# Altium PCB Guitar_Amp_PCB.PcbDoc
Units mm, origin at the board's own origin, x right, y up, seen from the top; angles counter-clockwise.
Board outline 60 x 50 mm, 2 copper layers (Top Layer, Bottom Layer), stack 1.273 mm thick; 65 components, 28 nets, 151 pads, 29 vias.
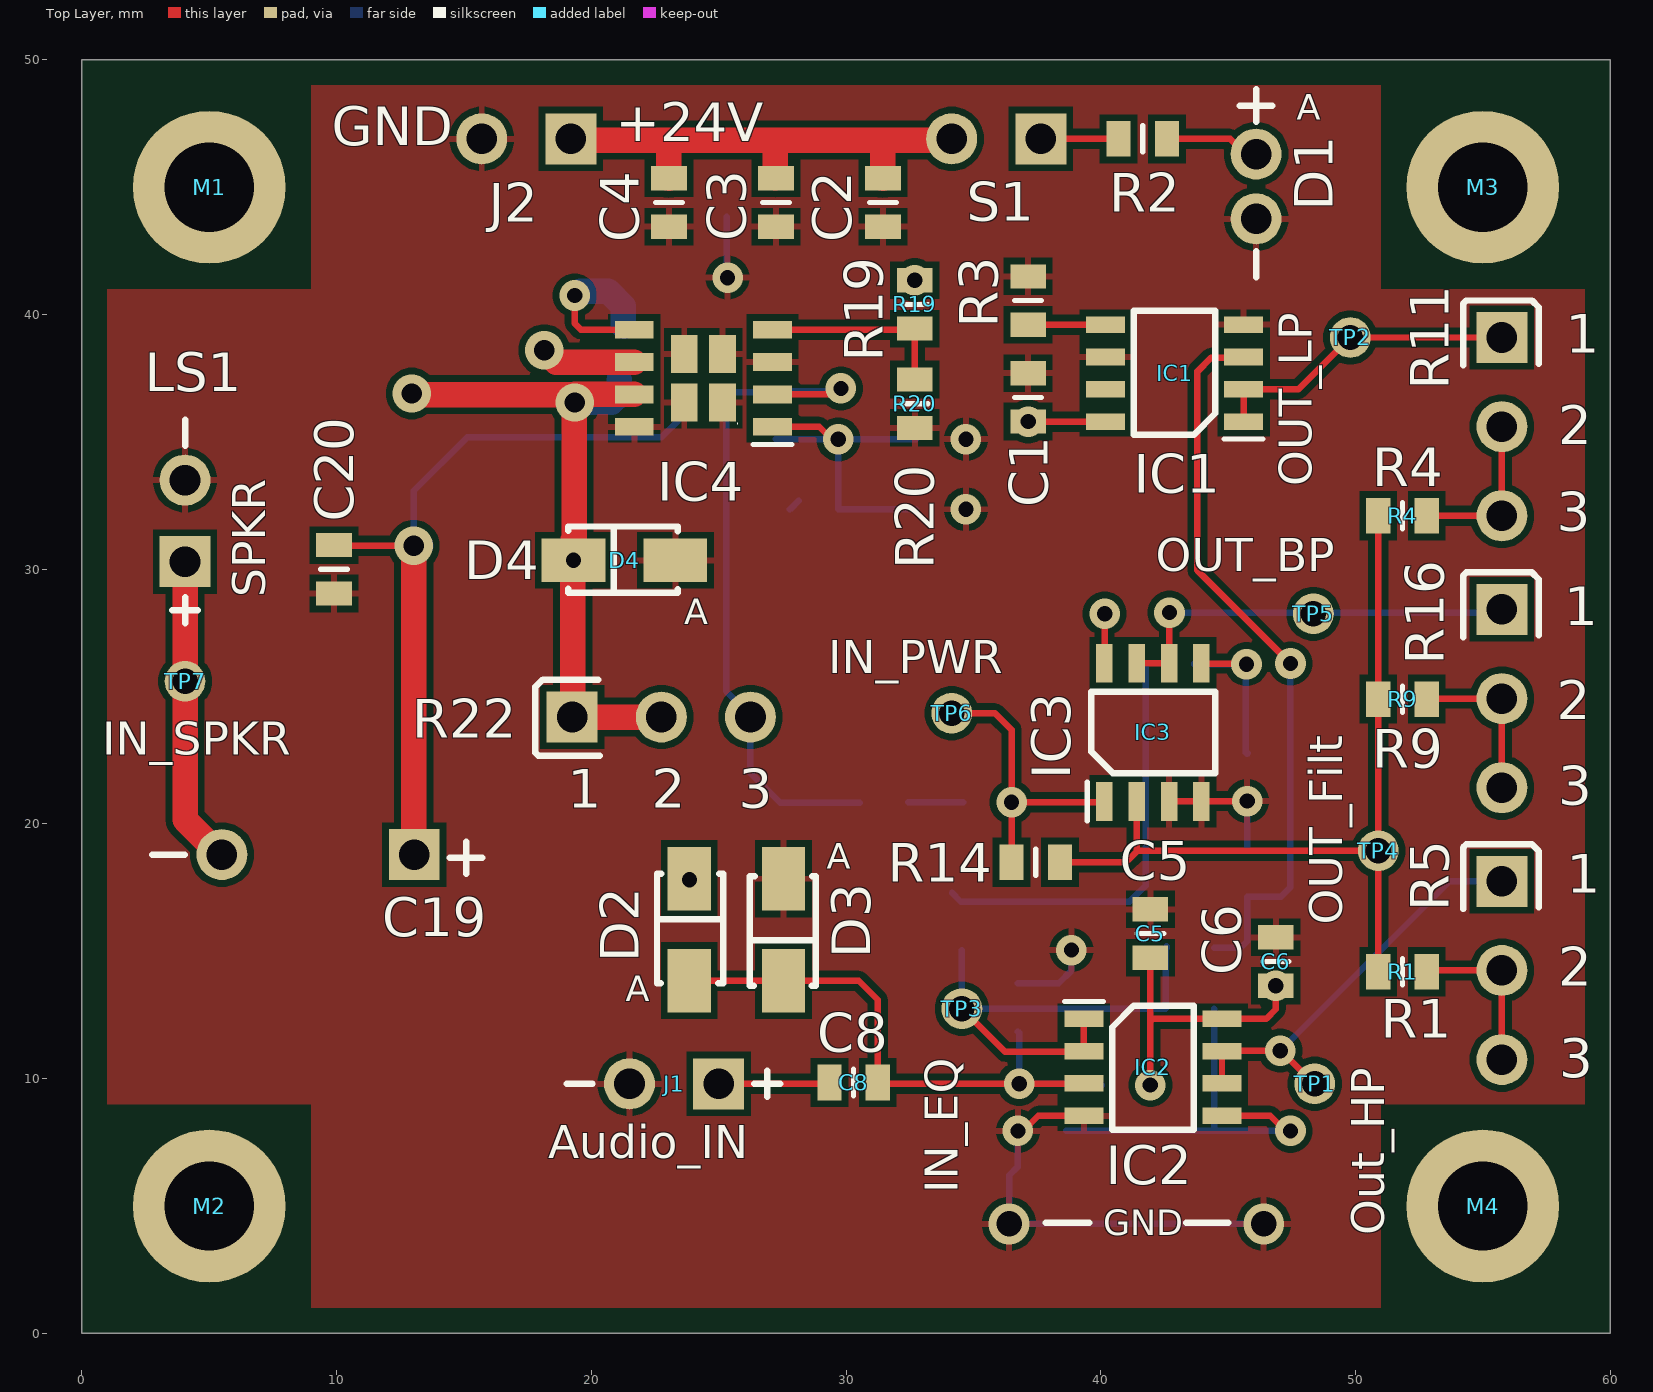
[diagram p0: Top Layer view]
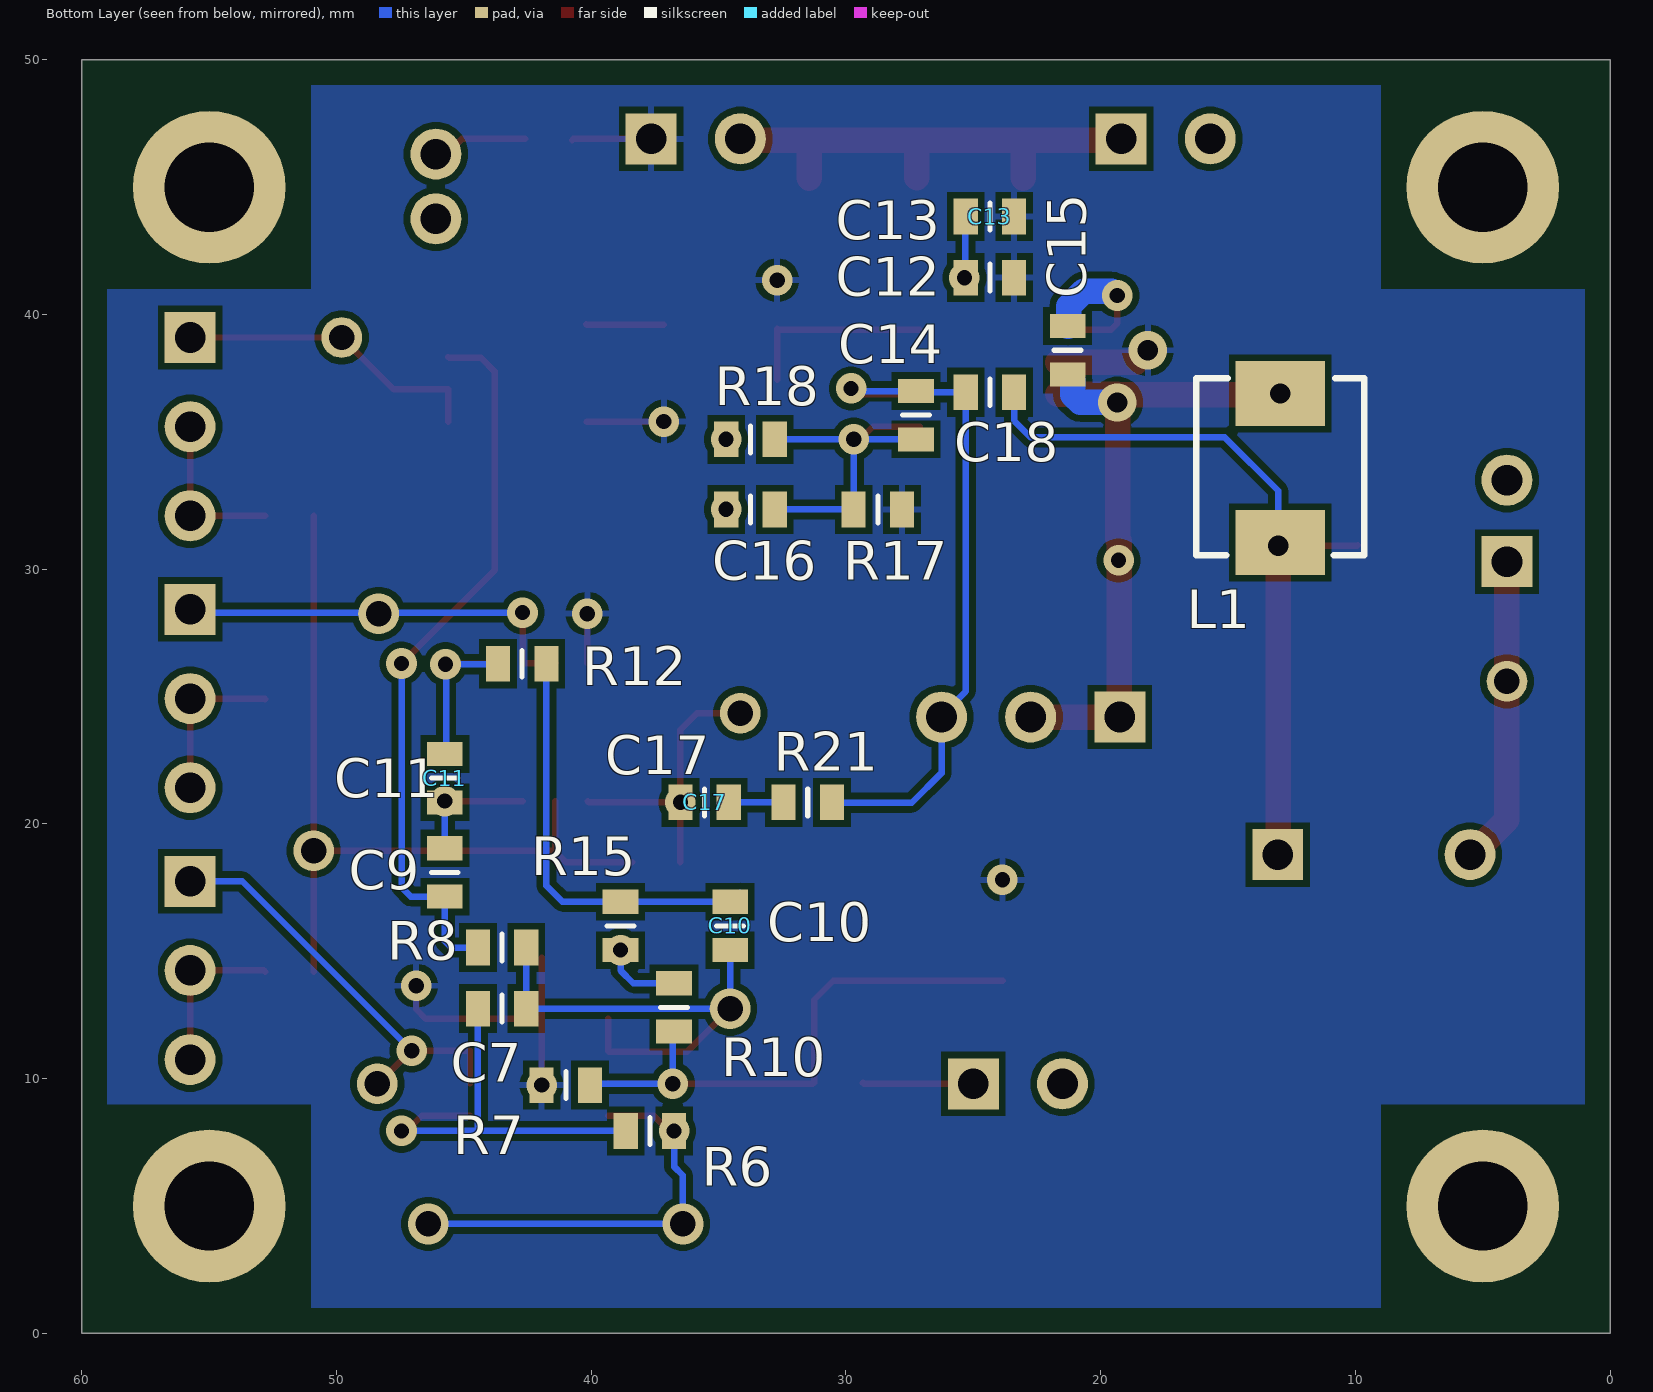
[diagram p1: Bottom Layer view, seen from below]

## Layer stack, top to bottom
Top Solder: solder mask 0.0102, Solder Resist, Dk 3.5
Top Layer: signal copper 0.07
Dielectric 2: prepreg 0.0711, PP-006, Dk 4.1
Dielectric 1: core 0.9906, Core-042, Dk 4.6
Dielectric 3: prepreg 0.0711, PP-006, Dk 4.1
Bottom Layer: signal copper 0.07
Bottom Solder: solder mask 0.0102, Solder Resist, Dk 3.5

## Board outline
0,0 60,0 60,50 0,50

## Design rules (kind name [scope] priority, off if disabled: settings)
Clearance [All] p1: gap=0.254 ignorepadtopadclearanceinfootprint=TRUE except(0: Arc-Hole Track-Hole SMDPad-Hole THPad-Hole Via-Hole Fill-Hole Poly-Hole Region-Hole Text-Hole)
HoleSize [All] p1: absolutevalues=TRUE maxlimit=4 minlimit=0.5 maxpercent=80.000 minpercent=20.000
MinimumAnnularRing [All] p1: minimumring=0.3
MinimumSolderMaskSliver [All] p1: minsoldermaskwidth=0.2
PolygonConnect [All] p1: connectstyle=Relief reliefconductorwidth=0.254 reliefentries=4 polygonreliefangle="90 Angle" airgapwidth=0.254
RoutingVias [All] p1: holewidth=0.711 width=1.27 viastyle="Through Hole" minholewidth=0.711 minwidth=1.27 maxholewidth=0.711 maxwidth=1.27
SilkToSilkClearance [All] p1: silktosilkclearance=0.15
SilkToSolderMaskClearance [IsPad] p1: minsilkscreentomaskgap=0.05 clearancetoexposedcopper=TRUE
SolderMaskExpansion [All] p1: expansion=0.1 istentingtop=FALSE
Width [All] p1: maxlimit=1 minlimit=0.254 preferedwidth=0.254 minimp=50.000000 maximp=50.000000 favimp=50.000000
26 further rules are at their usual default settings.

## Components (designator, comment, footprint, x,y, rotation, side; value= is the part's Value field where it differs from the comment)
C1 "100nF 0805" "C Template for 0805" 37.15,36.75 r90 top
C2 "100nF 0805" "C Template for 0805" 31.45,44.4 r270 top
C3 "100nF 0805" "C Template for 0805" 27.25,44.4 r270 top
C4 "100nF 0805" "C Template for 0805" 23.05,44.4 r270 top
C5 "100nF 0805" "C Template for 0805" 41.95,15.7 r90 top
C6 "100nF 0805" "C Template for 0805" 46.874,14.6 r90 top
C7 "8.2nF 0805" "C Template for 0805" 43.5,12.75 r0 bottom
C8 "82nF 0805" "C Template for 0805" 30.3,9.85 r0 top
C9 "82nF 0805" "C Template for 0805" 45.75,18.1 r270 bottom
C10 "82nF 0805" "C Template for 0805" 34.55,16 r90 bottom
C11 "8.2nF 0805" "C Template for 0805" 45.75,21.8 r90 bottom
C12 "2.2uF 0805" "C Template for 0805" 24.35,41.45 r180 bottom
C13 "100nF 0805" "C Template for 0805" 24.35,43.85 r180 bottom
C14 "5.6nF 0805" "C Template for 0805" 27.25,36.05 r270 bottom
C15 "470nF 0805" "C Template for 0805" 21.3,38.6 r90 bottom
C16 "10uF 0805" "C Template for 0805" 33.75,32.35 r180 bottom
C17 "2.2uF 0805" "C Template for 0805" 35.55,20.85 r180 bottom
C18 "22pF 0805" "C Template for 0805" 24.35,36.95 r0 bottom
C19 "1mF 50V" "C 1mF 50V Elko" 13.05,18.8 r180 top
C20 "470nF 0805" "C Template for 0805" 9.9,30 r90 top
D1 "?F" "5mm LED Red" 46.1,46.3 r270 top
D2 "Si-Diode" "Si-Diode Footprint" 23.85,13.85 r90 top
D3 "Si-Diode" "Si-Diode Footprint" 27.55,17.85 r270 top
D4 "B340LA" "B340LA-13-F Schottky Diode" 23.3,30.35 r180 top
IC1 "LM358DT" SOIC127P600X175-8N 42.9,37.7 r180 top
IC2 "LM358DT" SOIC127P600X175-8N 42.05,10.45 r0 top
IC3 "LM358DT" SOIC127P600X175-8N 42.05,23.6 r90 top
IC4 "MP7740DN-LF-Z" SOIC127P600X170-9N 24.4,37.5 r180 top
J1 "Audio-Jack" "Audio Inputjack" 25,9.8 r180 top
J2 "?F 080" "Power Supply Input" 19.2,46.9 r180 top
L1 "10uH 4A" "Inductor 10uH / 4A" 12.95,31.05 r90 bottom
LS1 "4 Ohm" 4_Ohm_Speaker 4.05,30.3 r90 top
M1 "M3 Mountinghole" "M3 Moutinghole"#1 4.55,46.25 r0 top
M2 "M3 Mountinghole" "M3 Moutinghole"#2 4.1,4.05 r0 top
M3 "M3 Mountinghole" "M3 Moutinghole"#3 56.45,46.4 r0 top
M4 "M3 Mountinghole" "M3 Moutinghole"#4 55.7,3.35 r0 top
R1 "10k 0805" "R Template for 0805" 51.85,14.2 r180 top
R2 "1k2 0805" "R Template for 0805" 41.65,46.9 r180 top
R3 "1k2 0805" "R Template for 0805" 37.15,40.55 r270 top
R4 "10k 0805" "R Template for 0805" 51.85,32.1 r180 top
R5 "10K Lin" Poti_standard_footprint 55.75,14.25 r270 top
R6 "10k 0805" "R Template for 0805" 37.7,7.95 r0 bottom
R7 "100k 0805" "R Template for 0805" 41,9.75 r0 bottom
R8 "10k 0805" "R Template for 0805" 43.5,15.15 r0 bottom
R9 "10k 0805" "R Template for 0805" 51.85,24.9 r180 top
R10 "100k 0805" "R Template for 0805" 36.75,12.8 r270 bottom
R11 "10K Lin" Poti_standard_footprint 55.75,35.6 r270 top
R12 "10k 0805" "R Template for 0805" 42.712,26.292 r180 bottom
R14 "10k 0805" "R Template for 0805" 37.45,18.5 r0 top
R15 "10k 0805" "R Template for 0805" 38.85,16 r90 bottom
R16 "10K Lin" Poti_standard_footprint 55.75,24.925 r270 top
R17 "100k 0805" "R Template for 0805" 28.75,32.35 r180 bottom
R18 "100k 0805" "R Template for 0805" 33.75,35.1 r180 bottom
R19 "100k 0805" "R Template for 0805" 32.7,40.4 r90 top
R20 "10k 0805" "R Template for 0805" 32.7,36.5 r90 top
R21 "10k 0805" "R Template for 0805" 31.5,20.85 r0 bottom
R22 "100k Lin" Poti_standard_footprint 22.75,24.2 r0 top
S1 "?H 0805" Switch 37.65,46.9 r180 top
TP1 "Testpoint_2.54mm" Testpoint_2.54mm 48.4,9.8 r90 top
TP2 "Testpoint_2.54mm" Testpoint_2.54mm 49.8,39.1 r90 top
TP3 "Testpoint_2.54mm" Testpoint_2.54mm 34.55,12.75 r90 top
TP4 "Testpoint_2.54mm" Testpoint_2.54mm 50.9,18.95 r90 top
TP5 "Testpoint_2.54mm" Testpoint_2.54mm 48.35,28.25 r90 top
TP6 "Testpoint_2.54mm" Testpoint_2.54mm 34.15,24.35 r90 top
TP7 "Testpoint_2.54mm" Testpoint_2.54mm 4.05,25.6 r90 top

## Footprints (in the part's own frame and the unit in brackets; to place one, negate y for a bottom-side part, rotate by r counter-clockwise, add the part's x,y. Pads: shape width x height; smd on the part's side, far side on the other; paste and mask are expansions set on the pad)
4_Ohm_Speaker [mm]
  rect 2x2 hole 1.2: 1(0,0)
  round 2 hole 1.2: 2(3.2,0)
  silkscreen extent -2.41,-0.51 5.57,0.51
"5mm LED Red" [mm]
  round 2 hole 1.2: 1(0,0) 2(2.54,0)
  silkscreen extent -2.54,-0.64 4.83,0.63
"Audio Inputjack" [mm]
  rect 2x2 hole 1.2: 1(0,0)
  round 2 hole 1.2: 2(3.5,0)
  silkscreen extent -2.41,-0.51 5.97,0.51
"B340LA-13-F Schottky Diode" [mm]
  rect 2.5x1.7 smd: 1(0,0) 2(4,0)
  silkscreen extent -0.1,-1.33 4.2,1.27
"C 1mF 50V Elko" [mm]
  rect 2x2 hole 1.2: 1(0,0)
  round 2 hole 1.2: 2(7.55,0)
  silkscreen extent -2.67,-0.51 10.29,0.76
"C Template for 0805" [mm]
  rect 0.95x1.4 smd: 1(-0.95,0) 2(0.95,0)
  silkscreen extent 0,-0.53 0,0.53
"Inductor 10uH / 4A" [mm]
  rect 2.55x3.5 smd: 1(0,0) 2(5.85,0)
  silkscreen extent -0.51,-3.3 6.44,3.3, body extent -0.56,-3.3 6.48,3.34, height 2.8
"M3 Moutinghole"#1 [mm]
  round 6 hole 3.5: 1(0.45,-1.25)
"M3 Moutinghole"#2 [mm]
  round 6 hole 3.5: 1(0.9,0.95)
"M3 Moutinghole"#3 [mm]
  round 6 hole 3.5: 1(-1.45,-1.4)
"M3 Moutinghole"#4 [mm]
  round 6 hole 3.5: 1(-0.7,1.65)
Poti_standard_footprint [mm]
  rect 2x2 hole 1.2: 1(-3.5,0)
  round 2 hole 1.2: 2(0,0) 3(3.5,0)
  silkscreen extent -4.95,-1.52 -2.41,1.45
"Power Supply Input" [mm]
  rect 2x2 hole 1.2: 1(0,0)
  round 2 hole 1.2: 2(3.5,0)
"R Template for 0805" [mm]
  rect 0.95x1.4 smd: 1(-0.95,0) 2(0.95,0)
  silkscreen extent 0,-0.53 0,0.53
"Si-Diode Footprint" [mm]
  rect 2.5x1.7 smd: 1(0,0) 2(4,0)
  silkscreen extent -0.1,-1.33 4.2,1.27
SOIC127P600X170-9N [mm]
  rect 1.525x0.7 smd: 1(-2.712,1.905) 2(-2.712,0.635) 3(-2.712,-0.635) 4(-2.712,-1.905) 5(2.712,-1.905) 6(2.712,-0.635) 7(2.712,0.635) 8(2.712,1.905)
  rect 1.05x1.5 smd: 9(-0.75,0.95) 9(-0.75,-0.95) 9(0.75,0.95) 9(0.75,-0.95)
  silkscreen extent -3.47,1.75 -1.35,2.61
SOIC127P600X175-8N [mm]
  rect 1.525x0.65 smd: 1(-2.712,1.905) 2(-2.712,0.635) 3(-2.712,-0.635) 4(-2.712,-1.905) 5(2.712,-1.905) 6(2.712,-0.635) 7(2.712,0.635) 8(2.712,1.905)
  silkscreen extent -3.47,-2.45 1.6,2.58
Switch [mm]
  rect 2x2 hole 1.2: 1(0,0)
  round 2 hole 1.2: 2(3.5,0)
Testpoint_2.54mm [mm]
  round 1.6 hole 1: 1(0,0)

## Part data
C1 C2 C3 C4 C5 C6 C7 C8 C9 C10 C11 C13 C14 C15 C16 C18 C20 L1 R1 R2 R3 R4 R6 R7 R8 R9 R10 R12 R14 R15 R17 R18 R19 R20 R21: library part RC0805FR-07100RP, Manufacturer_Name=KEMET, Mouser Part Number=603-RC0805FR-07100RP, Arrow Part Number=RC0805FR-07100RP, Arrow Price/Stock=https://www.arrow.com/en/products/rc0805fr-07100rp/yageo?region=nac, Datasheet Link=https://www.arrow.com/en/products/rc0805fr-07100rp/yageo?region=nac, Geometry.Height=0.6mm, Manufacturer_Part_Number=RC0805FR-07100RP, Mouser Price/Stock=https://www.mouser.co.uk/ProductDetail/YAGEO/RC0805FR-07100RP?qs=oypCK0zG324cSp99F0GBZw%3D%3D
C12 C17 D2 D3 M1 M2 M3 M4 TP1 TP2 TP3 TP4 TP5 TP6 TP7: Arrow Part Number=RC0805FR-07100RP, Manufacturer_Name=KEMET, Mouser Part Number=603-RC0805FR-07100RP, Arrow Price/Stock=https://www.arrow.com/en/products/rc0805fr-07100rp/yageo?region=nac, Datasheet Link=https://www.arrow.com/en/products/rc0805fr-07100rp/yageo?region=nac, Geometry.Height=0.6mm, Manufacturer_Part_Number=RC0805FR-07100RP, Mouser Price/Stock=https://www.mouser.co.uk/ProductDetail/YAGEO/RC0805FR-07100RP?qs=oypCK0zG324cSp99F0GBZw%3D%3D
C19: library part "Electrolyte Capacitor", "Mono Audio Input-Jack of Guitar", Arrow Part Number=RC0805FR-07100RP, Manufacturer_Name=KEMET, Mouser Part Number=603-RC0805FR-07100RP, Arrow Price/Stock=https://www.arrow.com/en/products/rc0805fr-07100rp/yageo?region=nac, Datasheet Link=https://www.arrow.com/en/products/rc0805fr-07100rp/yageo?region=nac, Geometry.Height=0.6mm, Manufacturer_Part_Number=RC0805FR-07100RP, Mouser Price/Stock=https://www.mouser.co.uk/ProductDetail/YAGEO/RC0805FR-07100RP?qs=oypCK0zG324cSp99F0GBZw%3D%3D
D1: library part "5mm LED red", "5mm LED red", Arrow Part Number=RC0805FR-07100RP, Manufacturer_Name=KEMET, Mouser Part Number=603-RC0805FR-07100RP, Arrow Price/Stock=https://www.arrow.com/en/products/rc0805fr-07100rp/yageo?region=nac, Datasheet Link=https://www.arrow.com/en/products/rc0805fr-07100rp/yageo?region=nac, Geometry.Height=0.6mm, Manufacturer_Part_Number=RC0805FR-07100RP, Mouser Price/Stock=https://www.mouser.co.uk/ProductDetail/YAGEO/RC0805FR-07100RP?qs=oypCK0zG324cSp99F0GBZw%3D%3D
D4: library part BL340LA-13-F, "BL340LA-13-F SMA-Package", Arrow Part Number=RC0805FR-07100RP, Manufacturer_Name=KEMET, Mouser Part Number=603-RC0805FR-07100RP, Arrow Price/Stock=https://www.arrow.com/en/products/rc0805fr-07100rp/yageo?region=nac, Datasheet Link=https://www.arrow.com/en/products/rc0805fr-07100rp/yageo?region=nac, Geometry.Height=0.6mm, Manufacturer_Part_Number=RC0805FR-07100RP, Mouser Price/Stock=https://www.mouser.co.uk/ProductDetail/YAGEO/RC0805FR-07100RP?qs=oypCK0zG324cSp99F0GBZw%3D%3D
IC1 IC2 IC3: "LM358DT, Dual Operational Amplifier 1.1MHz 5 to 28V, 8-Pin SO", Manufacturer_Name=STMicroelectronics, Mouser Part Number=511-LM358DT, Arrow Part Number=LM358DT, Arrow Price/Stock=https://www.arrow.com/en/products/lm358dt/stmicroelectronics?region=europe, Datasheet Link=http://www.st.com/st-web-ui/static/active/en/resource/technical/document/datasheet/CD00000464.pdf, Geometry.Height=1.75mm, Manufacturer_Part_Number=LM358DT, Mouser Price/Stock=https://www.mouser.co.uk/ProductDetail/STMicroelectronics/LM358DT?qs=omvQGv%252BAfzDWfqgV6a5v9A%3D%3D
IC4: "Audio Amplifiers 15W Class-D Mono Single End Audio Amp", Manufacturer_Name="Monolithic Power Systems (MPS)", Mouser Part Number=946-MP7740DNLFZ, Datasheet Link=https://componentsearchengine.com/Datasheets/1/MP7740DN-LF-Z.pdf, Geometry.Height=1.7mm, Manufacturer_Part_Number=MP7740DN-LF-Z, Mouser Price/Stock=https://www.mouser.co.uk/ProductDetail/Monolithic-Power-Systems-MPS/MP7740DN-LF-Z?qs=rC7bBWoQAAkZXpb7FkuwCg%3D%3D
J1: "Mono Audio Input-Jack of Guitar", Arrow Part Number=RC0805FR-07100RP, Manufacturer_Name=KEMET, Mouser Part Number=603-RC0805FR-07100RP, Arrow Price/Stock=https://www.arrow.com/en/products/rc0805fr-07100rp/yageo?region=nac, Datasheet Link=https://www.arrow.com/en/products/rc0805fr-07100rp/yageo?region=nac, Geometry.Height=0.6mm, Manufacturer_Part_Number=RC0805FR-07100RP, Mouser Price/Stock=https://www.mouser.co.uk/ProductDetail/YAGEO/RC0805FR-07100RP?qs=oypCK0zG324cSp99F0GBZw%3D%3D
J2: library part "Power Supply Input Socket", Arrow Part Number=RC0805FR-07100RP, Manufacturer_Name=KEMET, Mouser Part Number=603-RC0805FR-07100RP, Arrow Price/Stock=https://www.arrow.com/en/products/rc0805fr-07100rp/yageo?region=nac, Datasheet Link=https://www.arrow.com/en/products/rc0805fr-07100rp/yageo?region=nac, Geometry.Height=0.6mm, Manufacturer_Part_Number=RC0805FR-07100RP, Mouser Price/Stock=https://www.mouser.co.uk/ProductDetail/YAGEO/RC0805FR-07100RP?qs=oypCK0zG324cSp99F0GBZw%3D%3D
LS1: library part "4 Ohm Speaker", "4 Ohm Speaker", Arrow Part Number=RC0805FR-07100RP, Manufacturer_Name=KEMET, Mouser Part Number=603-RC0805FR-07100RP, Arrow Price/Stock=https://www.arrow.com/en/products/rc0805fr-07100rp/yageo?region=nac, Datasheet Link=https://www.arrow.com/en/products/rc0805fr-07100rp/yageo?region=nac, Geometry.Height=0.6mm, Manufacturer_Part_Number=RC0805FR-07100RP, Mouser Price/Stock=https://www.mouser.co.uk/ProductDetail/YAGEO/RC0805FR-07100RP?qs=oypCK0zG324cSp99F0GBZw%3D%3D
R5 R11 R16: library part "10k Linear Potentiometer", Arrow Part Number=RC0805FR-07100RP, Manufacturer_Name=KEMET, Mouser Part Number=603-RC0805FR-07100RP, Arrow Price/Stock=https://www.arrow.com/en/products/rc0805fr-07100rp/yageo?region=nac, Datasheet Link=https://www.arrow.com/en/products/rc0805fr-07100rp/yageo?region=nac, Geometry.Height=0.6mm, Manufacturer_Part_Number=RC0805FR-07100RP, Mouser Price/Stock=https://www.mouser.co.uk/ProductDetail/YAGEO/RC0805FR-07100RP?qs=oypCK0zG324cSp99F0GBZw%3D%3D
R22: library part "100k Linear Potentiometer", Arrow Part Number=RC0805FR-07100RP, Manufacturer_Name=KEMET, Mouser Part Number=603-RC0805FR-07100RP, Arrow Price/Stock=https://www.arrow.com/en/products/rc0805fr-07100rp/yageo?region=nac, Datasheet Link=https://www.arrow.com/en/products/rc0805fr-07100rp/yageo?region=nac, Geometry.Height=0.6mm, Manufacturer_Part_Number=RC0805FR-07100RP, Mouser Price/Stock=https://www.mouser.co.uk/ProductDetail/YAGEO/RC0805FR-07100RP?qs=oypCK0zG324cSp99F0GBZw%3D%3D
S1: library part Switch, Arrow Part Number=RC0805FR-07100RP, Manufacturer_Name=KEMET, Mouser Part Number=603-RC0805FR-07100RP, Arrow Price/Stock=https://www.arrow.com/en/products/rc0805fr-07100rp/yageo?region=nac, Datasheet Link=https://www.arrow.com/en/products/rc0805fr-07100rp/yageo?region=nac, Geometry.Height=0.6mm, Manufacturer_Part_Number=RC0805FR-07100RP, Mouser Price/Stock=https://www.mouser.co.uk/ProductDetail/YAGEO/RC0805FR-07100RP?qs=oypCK0zG324cSp99F0GBZw%3D%3D

## Via types
v1: diameter 1.2, hole 0.6, Top Layer to Bottom Layer, 23 vias
v2: diameter 1.5, hole 0.8, Top Layer to Bottom Layer, 4 vias
v3: diameter 1.6, hole 1, Top Layer to Bottom Layer, 2 vias

## Nets (pads, with @x,y where several pads share a name; then routed paths per layer and width w, separated by ;. In a path a pad name is that pad's centre, name@x,y a point inside that pad or via, vN(x,y) a via of type N, cw(c..) or ccw(c..) an arc to the next point about the centre after c; other vN are vias at no path point)
Enable_+1.8V: IC4.4 R19.1 R20.2 | length 7.6
  Top Layer w0.254: IC4.4 32.655,39.405 R19.1 R20.2
GND: C1.2 C2.2 C3.2 C4.2 C5.2 C6.2 C9.1 C11.1 C12.1 C13.1 C16.1 C20.1 D1.2 D3.1 D4.1 IC1.4 IC1.6 IC2.4 IC3.3 IC3.4 IC4.3 IC4.8 IC4.9 J1.2 J2.2 LS1.2 R3.1 R6.1 R10.1 R15.1 R18.1 R20.1 | length 27.1
  Top Layer w0.254: v1(36.75,7.95) 36.947,7.95 37.542,8.545 IC2.4 ; IC3.3 IC3.4 43.967,20.9 v1(45.75,20.9)
  Bottom Layer w0.254: C13.1@25.312,43.838 25.312,41.488 v1(25.35,41.45) ; v3(36.4,4.3) v3@36.408,4.3 ; v1(36.75,7.95) 36.75,6.552 36.408,6.21 v3@36.408,4.3 ; R10.1 38.35,13.75 38.85,14.25 v1(38.85,15.05) ; C9.1 C11.1 v1(45.75,20.9) ; v3(46.4,4.3) v3@36.408,4.3
  other v1: 34.708,32.357 34.708,35.108
Input_Amplifier: C17.1 IC3.1 R14.1 TP6.1 | length 11.5
  Top Layer w0.254: TP6.1 35.85,24.35 36.5,23.7 v1(36.5,20.85) ; R14.1 v1(36.5,20.85) ; IC3.1 40.107,20.85 v1(36.5,20.85)
Input_Equalizer: C7.1 C10.1 IC2.1 IC2.2 R8.1 TP3.1 | length 19.9
  Top Layer w0.254: TP3.1@34.914,12.75 TP3.1 36.25,11.05 39.303,11.05 IC2.2 IC2.1
  Bottom Layer w0.254: C10.1 TP3.1 C7.1 42.55,15.1 42.6,15.15 R8.1@42.6,15.2
NetC2_1: C2.1 C3.1 C4.1 J2.1 S1.2 | length 19.5
  Top Layer w1: J2.1 19.25,46.85 23.1,46.85 ; C4.1 23.05,46.8 23.1,46.85 ; C3.1@27.23,45.37 27.23,46.85 ; C2.1 31.45,46.85 ; S1.2 34.1,46.85 31.45,46.85 ; 23.1,46.85 27.23,46.85 ; 27.23,46.85 31.45,46.85
NetC7_2: C7.2 IC2.5 R6.2 | length 16.5
  Top Layer w0.254: IC2.5 46.658,8.545 47.253,7.95 v1(47.45,7.95)
  Bottom Layer w0.254: R6.2 44.45,7.95 ; C7.2 44.45,7.95 ; v1(47.45,7.95) 44.45,7.95
NetC8_1: C8.1 J1.1 | length 4.4
  Top Layer w0.254: J1.1 29.3,9.8 C8.1
NetC8_2: C8.2 D2.1 D3.2 IC2.3 R7.1 R10.2 | length 24.4
  Top Layer w0.254: D2.1 D3.2 30.5,13.85 31.25,13.1 C8.2 31.3,9.8 v1(36.8,9.8) 36.808,9.808 39.33,9.808 IC2.3
  Bottom Layer w0.254: R10.2 36.8,11.8 v1(36.8,9.8) 40,9.8 R7.1
NetC9_2: C9.2 IC1.3 R8.2 | length 29
  Top Layer w0.254: IC1.3 45.577,38.3 44.329,38.3 43.797,37.767 43.797,29.953 v1(47.45,26.3) v1@47.25,26.3
  Bottom Layer w0.254: R8.2 45.5,15.15 45.75,15.4 C9.2 47.087,17.15 47.45,17.513 v1(47.45,26.3)
NetC10_2: C10.2 R12.2 R15.2 | length 16.7
  Bottom Layer w0.254: C10.2@34.162,17.298 34.51,16.95 C10.2 39,16.95 41.134,16.95 41.762,17.578 R12.2
NetC11_2: C11.2 IC3.5 R12.1 | length 7.4
  Top Layer w0.254: IC3.5 43.967,26.3 v1@45.7,26.3
  Bottom Layer w0.254: R12.1 43.678,26.276 v1(45.724,26.276) ; v1@45.7,26.3 45.7,22.8 C11.2 C11.2@45.772,22.772
NetC14_1: C14.1 C18.2 IC4.2 R21.1 R22.3 | length 27.3
  Top Layer w0.254: IC4.2 29.309,36.865 29.544,37.1 v1(29.8,37.1)
  Bottom Layer w0.254: v1@29.691,36.991 27.259,36.991 27.217,36.95 C18.2 25.3,25.203 26.25,24.253 R22.3 26.25,22 27.415,20.835 R21.1@30.535,20.835
NetC14_2: C14.2 C16.2 IC4.1 R17.1 R18.2 | length 14.1
  Top Layer w0.254: IC4.1 28.949,35.595 29.444,35.1 v1(29.7,35.1)
  Bottom Layer w0.254: C14.2 v1(29.7,35.1) ; C16.2@32.756,32.35 R17.1 v1(29.7,35.1) ; R18.2@32.756,35.1 v1(29.7,35.1)
NetC15_1: C15.1 D4.2 IC4.7 L1.2 R22.1 R22.2 | length 27.7
  Top Layer w0.254: v2(12.95,36.9) v2@12.992,36.858 ; v2@19.308,36.858 v2@19.35,36.815
  Top Layer w1: v2@12.992,36.858 v2@19.308,36.858 ; v2@19.35,36.815 v2(19.35,36.55) 19.325,36.525 19.325,31.175 19.3,31.15 19.275,31.125 19.275,24.225 R22.1 R22.2 ; v2@19.35,36.865 IC4.7
  Bottom Layer w0.254: C15.1@21.1,37.45 C15.1
  Bottom Layer w1: v2(19.35,36.55) 20.8,36.55 21.1,36.85 C15.1@21.1,37.45
  other v1: 19.3,30.35
NetC15_2: C15.2 IC4.5 | length 6.6
  Top Layer w0.254: v1(19.35,40.75) 19.35,39.65 19.595,39.405 IC4.5
  Bottom Layer w1: v1(19.35,40.75) 19.404,40.75 19.573,40.919 20.664,40.919 21.25,40.334 21.25,39.575 21.275,39.55 C15.2
NetC17_2: C17.2 R21.2 | length 2.1
  Bottom Layer w0.254: R21.2 C17.2
NetC18_1: C18.1 C19.1 C20.2 L1.1 | length 30.3
  Top Layer w0.254: C20.2 9.929,30.921 v2(13.029,30.921)
  Top Layer w1: v2(13.029,30.921) 13.029,18.821 C19.1
  Bottom Layer w0.254: v2(13.029,30.921) 13.029,33.079 15.126,35.176 22.75,35.176 23.4,35.827 C18.1
  Bottom Layer w1: v2(13.029,30.921) L1.1@13.296,30.921
NetC19_2: C19.2 LS1.1 TP7.1 | length 12.1
  Top Layer w1: LS1.1 4.05,23.7 4.05,20.164 C19.2@5.414,18.8
NetD1_1: D1.1 R2.1 | length 3.7
  Top Layer w0.254: R2.1 45.078,46.9 45.678,46.3 D1.1
NetIC1_1: IC1.1 IC1.2 R11.1 TP2.1 | length 12.3
  Top Layer w0.254: IC1.1 IC1.2 47.765,37.065 TP2.1 R11.1
NetIC1_5: IC1.5 R3.2 | length 3.1
  Top Layer w0.254: R3.2 37.155,39.605 IC1.5 IC1.5@40.2,39.617
NetIC2_6: IC2.6 IC2.7 R5.1 TP1.1 | length 16.9
  Top Layer w0.254: IC2.6 IC2.7 44.769,11.093 47.043,11.093 v1(47.05,11.1) 47.075,11.1 48.375,9.8 TP1.1
  Bottom Layer w0.254: v1(47.05,11.1) 53.7,17.75 R5.1
NetIC3_2: IC3.2 R1.2 R4.2 R9.2 R14.2 TP4.1 | length 32.5
  Top Layer w0.254: R14.2 40.993,18.5 41.443,18.95 ; IC3.2 41.415,18.978 41.443,18.95 ; R1.2 TP4.1 ; R4.2 R9.2 TP4.1 ; 41.443,18.95 TP4.1
NetIC3_6: IC3.6 IC3.7 R16.1 TP5.1 | length 16.4
  Top Layer w0.254: IC3.7 IC3.6 42.693,26.32 42.693,28.292 v1(42.7,28.3)
  Bottom Layer w0.254: v1(42.7,28.3) 55.625,28.3 R16.1
NetR1_1: R1.1 R5.2 R5.3 | length 6.5
  Top Layer w0.254: R1.1 52.85,14.25 R5.2 R5.3
NetR4_1: R4.1 R11.2 R11.3 | length 6.5
  Top Layer w0.254: R4.1 R11.3 R11.2
NetR9_1: R9.1 R16.2 R16.3 | length 6.5
  Top Layer w0.254: R9.1 52.825,24.925 R16.2 R16.3
VCC: C1.1 C5.1 C6.1 C12.2 C13.2 D2.2 IC1.8 IC2.8 IC3.8 IC4.6 R2.2 R7.2 R17.2 R19.2 S1.1 | length 23.4
  Top Layer w0.254: v1(37.15,35.8) 37.155,35.795 IC1.8 ; S1.1@37.645,46.895 S1.1 R2.2 R2.2@40.75,46.85 ; IC3.8 40.151,26.318 40.151,28.251 v1(40.158,28.258) ; v1(41.95,9.75) 41.95,12.25 ; C5.1 41.95,12.25 ; v1(46.874,13.65) 46.874,12.724 46.505,12.355 IC2.8 42.055,12.355 41.95,12.25
  Top Layer w1: v2(18.15,38.6) 18.615,38.135 IC4.6
  Bottom Layer w0.254: R17.2 R17.2@28.148,32.698 ; R7.2@41.959,9.759 R7.2@41.968,9.768
  other v1: 23.858,17.808 32.7,41.35
pads on no net: IC1.7 M1.1 M2.1 M3.1 M4.1

## Polygon pours and split planes (outlines as drawn)
VCC on Bottom Layer "VCC_L02_P001" (solid, pour order 1): 1,41 9,41 9,49 51,49 51,41 59,41 59,9 51,9 51,1 9,1 9,9 1,9
GND on Top Layer "GND_L01_P002" (solid, pour order 2): 9,41 1,41 1,9 9,9 9,1 51,1 51,9 59,9 59,41 51,41 51,49 9,49

## Silkscreen, mask and mechanical layers (free items; w line width, h text height)
Top Overlay:
  lines w0.254: 37.85,4.35 39.55,4.35 ; 43.35,4.35 45,4.35
  text "A" at 47.7,47.65 h1
  text "SPKR" at 7.196,28.904 h1.3 r90
  text "A" at 23.65,27.85 h1
  text "IN_SPKR" at 0.804,22.721 h1.3
  text "A" at 29.25,18.25 h1
  text "A" at 21.35,13.05 h1
  text "Audio_IN" at 18.304,6.871 h1.3
  text "GND" at 40.1,3.85 h1
  text "Out_HP" at 51.129,3.854 h1.3 r90
Top Solder:
  drawing of 2 lines, arcs and shapes, not listed
  text "MITR" at 15.05,3.65 h1
  text "Guitar Amp v2.0" at 15.104,1.404 h1.5
Mechanical 1:
  lines w0.01: 0,0 60,0 60,50 0,50 0,0
  lines w0.2: 1,9 5,9 ; 1,41 5,41 ; 9,1 9,5 ; 9,49 9,45 ; 51,1 51,5 ; 51,49 51,45 ; 59,9 55,9 ; 59,41 55,41 ; 5,9 9,9 9,5 ; 5,9 5,5 9,5 ; 5,41 9,41 9,45 ; 5,41 5,45 9,45 ; 51,5 55,5 55,9 ; 51,5 51,9 55,9 ; 51,45 55,45 55,41 ; 51,45 51,41 55,41

## Text inside footprints (layer, text, board x,y; h text height)
J2: Top Overlay "+24V" at 20.954,46.804 h1.52; Top Overlay "GND" at 9.804,46.654 h1.52
R5: Top Overlay "3" at 58.004,10.054 h1.52; Top Overlay "2" at 57.954,13.654 h1.52; Top Overlay "1" at 58.304,17.304 h1.52
R11: Top Overlay "3" at 57.904,31.504 h1.52; Top Overlay "2" at 57.954,34.904 h1.52; Top Overlay "1" at 58.254,38.504 h1.52
R16: Top Overlay "3" at 57.954,20.754 h1.52; Top Overlay "2" at 57.904,24.104 h1.52; Top Overlay "1" at 58.204,27.804 h1.52
R22: Top Overlay "3" at 25.798,20.644 h1.52; Top Overlay "2" at 22.369,20.644 h1.52; Top Overlay "1" at 19.067,20.644 h1.52
TP2: Top Overlay "OUT_LP" at 48.279,33.254 h1.3 r90
TP3: Top Overlay "IN_EQ" at 34.379,5.504 h1.3 r90
TP4: Top Overlay "OUT_Filt" at 49.479,16.054 h1.3 r90
TP5: Top Overlay "OUT_BP" at 42.154,29.921 h1.3
TP6: Top Overlay "IN_PWR" at 29.304,25.921 h1.3